# Altium PCB SpaceVNX.PcbDoc (part 2 of 2)
Units mm, origin at the board's own origin, x right, y up, seen from the top; angles counter-clockwise.
Board outline 73 x 84 mm, 6 copper layers (Top Layer, Int1 (GND), Int2 (Sign), Int3 (Sign), Int4 (PWR), Bottom Layer), stack 1.552 mm thick; 68 components, 82 nets, 1011 pads, 708 vias.
Unrouted connection lines stored in the file: 280.
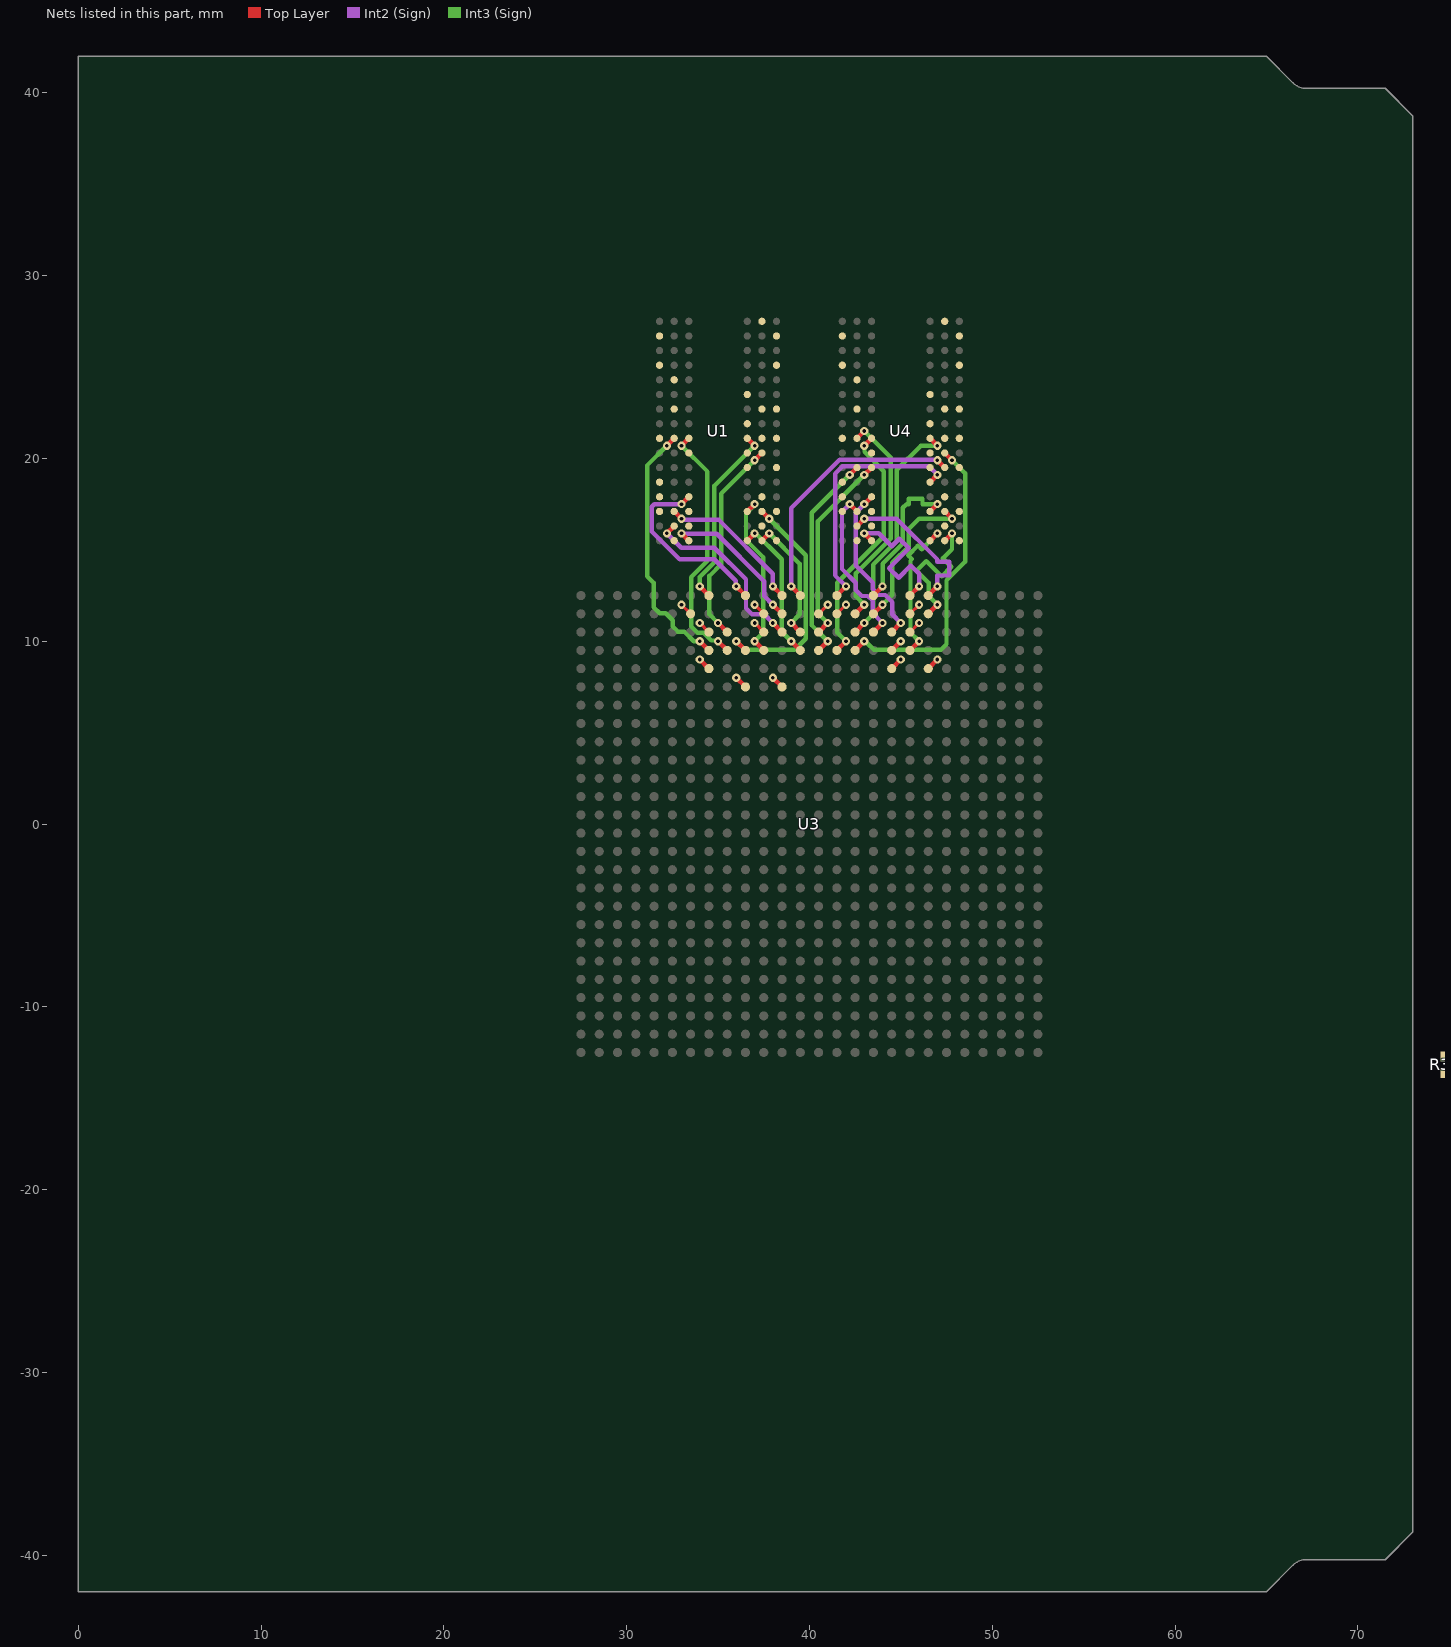
[diagram p6: the nets of this part, all layers, seen from the top]

## Via types
v1: diameter 0.45, hole 0.2, Top Layer to Bottom Layer, 708 vias

## Nets (pads, with @x,y where several pads share a name; then routed paths per layer and width w, separated by ;. In a path a pad name is that pad's centre, name@x,y a point inside that pad or via, vN(x,y) a via of type N, cw(c..) or ccw(c..) an arc to the next point about the centre after c; other vN are vias at no path point) (continued)
PS_DDR_DQ4: U1.H3 U3.H26 | length 10.2
  Top Layer w0.251: v1(34,13) U3.H26@34.5,12.5 ; U1.H3@36.6,21.1 v1(37,20.7)
  Int3 (Sign) w0.242: v1(34,13) 34,13.513 34.798,14.311 34.798,18.498 v1(37,20.7)
PS_DDR_DQ5: U1.H8 U3.H23 | length 14.2
  Top Layer w0.251: v1(32.2,20.7) U1.H8@32.6,21.1 ; v1(34,10) U3.H23@34.5,9.5
  Int3 (Sign) w0.242: v1(32.2,20.7) 31.115,19.615 31.115,13.554 31.473,13.196 31.473,11.858 31.804,11.527 32.142,11.527 32.527,11.142 32.527,10.804 32.804,10.527 33.142,10.527 33.669,10 v1(34,10)
PS_DDR_DQ6: U1.G2 U3.J24 | length 11.4
  Top Layer w0.251: v1(35,11) U3.J24@35.5,10.5 ; v1(37,19.9) U1.G2@37.4,20.3
  Int3 (Sign) w0.242: v1(35,11) 34.527,11.473 34.527,13.572 35.179,14.224 35.179,18.079 v1(37,19.9)
PS_DDR_DQ7: U1.H7 U3.J23 | length 13.9
  Top Layer w0.251: v1(33,20.7) U1.H7@33.4,21.1 ; v1(35,10) U3.J23@35.5,9.5
  Int3 (Sign) w0.242: v1(33,20.7) 34.417,19.283 34.417,14.398 33.527,13.508 33.527,10.804 33.858,10.473 34.196,10.473 34.629,10.04 34.96,10.04 v1(35,10)
PS_DDR_DQ8: U1.D7 U3.K26 | length 10.4
  Top Layer w0.251: v1(33,17.5) U1.D7@33.4,17.9 ; v1(36,13) U3.K26@36.5,12.5
  Int2 (Sign) w0.242: v1(33,17.5) 31.511,17.5 31.369,17.358 31.369,16.002 32.893,14.478 34.798,14.478 35.964,13.312 35.964,13.036 v1(36,13)
PS_DDR_DQ9: U1.C3 U3.L23 | length 9.6
  Top Layer w0.251: U1.C3@36.6,17.1 v1(37,17.5) ; v1(37,10) U3.L23@37.5,9.5
  Int3 (Sign) w0.242: v1(37,10) 37.473,10.473 37.473,13.196 37.465,13.204 37.465,14.605 36.527,15.543 36.527,16.969 36.896,17.338 36.896,17.34 v1@37.082,17.526
PS_DDR_DQ10: U1.C8 U3.M26 | length 8.2
  Top Layer w0.251: U1.C8@32.6,17.1 v1(33,16.7) ; v1(38,13) U3.M26@38.5,12.5
  Int2 (Sign) w0.242: v1@33.02,16.637 35.052,16.637 38,13.689 v1(38,13)
PS_DDR_DQ11: U1.C2 U3.K23 | length 12.9
  Top Layer w0.251: v1(36,10) U3.K23@36.5,9.5 ; U1.C2@37.4,17.1 v1(37.8,16.7)
  Int3 (Sign) w0.242: v1(36,10) 36.473,9.527 39.196,9.527 39.804,10.135 39.804,14.696 v1(37.8,16.7)
PS_DDR_DQ12: U1.A7 U3.M25 | length 8.3
  Top Layer w0.251: v1(33,15.9) U1.A7@33.4,15.5 ; v1(38,12) U3.M25@38.5,11.5
  Int2 (Sign) w0.242: v1@33.02,15.875 34.925,15.875 37.527,13.273 37.527,12.473 v1(38,12)
PS_DDR_DQ13: U1.A2 U3.N24 | length 7.1
  Top Layer w0.251: U1.A2@37.4,15.5 v1(37.8,15.9) ; v1(39,11) U3.N24@39.5,10.5
  Int3 (Sign) w0.242: v1(37.8,15.9) 39.473,14.227 39.473,11.473 v1(39,11)
PS_DDR_DQ14: U1.B8 U3.M24 | length 10
  Top Layer w0.251: v1(32.2,15.9) U1.B8@32.6,16.3 ; v1(38,11) U3.M24@38.5,10.5
  Int2 (Sign) w0.242: v1(32.2,15.9) 32.987,15.113 34.798,15.113 36.527,13.384 36.527,11.804 36.858,11.473 37.527,11.473 v1(38,11)
PS_DDR_DQ15: U1.A3 U3.N23 | length 8.1
  Top Layer w0.251: U1.A3@36.6,15.5 v1(37,15.9) ; v1(39,10) U3.N23@39.5,9.5
  Int3 (Sign) w0.242: v1@36.957,16.002 38.481,14.478 38.481,10.519 v1(39,10)
PS_DDR_DQ16: U3.R26 U4.E3 | length 13.6
  Top Layer w0.251: U3.R26@41.5,12.5 v1(42,13) ; U4.E3@46.6,18.7 v1(47,19.1)
  Int2 (Sign) w0.242: v1(42,13) 41.402,13.598 41.402,19.162 41.813,19.573 46.527,19.573 v1(47,19.1)
PS_DDR_DQ17: U3.P24 U4.F7 | length 10.6
  Top Layer w0.251: U3.P24@40.5,10.5 v1(41,11) ; v1(43,19.1) U4.F7@43.4,19.5
  Int3 (Sign) w0.242: v1(41,11) 40.466,11.534 40.466,14.97 40.463,14.973 40.463,16.563 v1(43,19.1)
PS_DDR_DQ18: U3.N26 U4.F2 | length 14.7
  Top Layer w0.251: v1(39,13) U3.N26@39.5,12.5 ; v1(47,19.9) U4.F2@47.4,19.5
  Int2 (Sign) w0.242: v1(39,13) 39,17.283 41.656,19.939 46.961,19.939 v1(47,19.9)
PS_DDR_DQ19: U3.P23 U4.F8 | length 11.6
  Top Layer w0.251: U3.P23@40.5,9.5 v1(41,10) ; v1(42.2,19.1) U4.F8@42.6,19.5
  Int3 (Sign) w0.242: v1(41,10) 40.135,10.865 40.135,14.833 40.132,14.836 40.132,17.032 v1(42.2,19.1)
PS_DDR_DQ20: U3.T24 U4.H3 | length 13.2
  Top Layer w0.251: U3.T24@42.5,10.5 v1(43,11) ; U4.H3@46.6,21.1 v1(47,20.7)
  Int3 (Sign) w0.242: v1(43,11) 43.491,11.491 43.491,14.194 44.781,15.484 44.781,19.381 46.1,20.7 v1(47,20.7)
PS_DDR_DQ21: U3.T25 U4.H8 | length 12.4
  Top Layer w0.251: U3.T25@42.5,11.5 v1(43,12) ; U4.H8@42.6,21.1 v1(43,21.5)
  Int3 (Sign) w0.242: v1(43,12) 42.545,12.455 42.545,13.716 44.45,15.621 44.45,20.05 v1(43,21.5)
PS_DDR_DQ22: U3.T23 U4.G2 | length 16.9
  Top Layer w0.251: U3.T23@42.5,9.5 v1(43,10) ; U4.G2@47.4,20.3 v1(47.8,19.9)
  Int3 (Sign) w0.242: v1(43,10) 43.056,10 43.16,9.896 43.164,9.896 43.533,9.527 47.196,9.527 47.498,9.829 47.498,13.335 48.514,14.351 48.514,19.186 v1(47.8,19.9)
PS_DDR_DQ23: U3.R23 U4.H7 | length 13.6
  Top Layer w0.251: U3.R23@41.5,9.5 v1(42,10) ; v1(43,20.7) U4.H7@43.4,21.1
  Int3 (Sign) w0.242: v1(42,10) 41.527,10.473 41.527,13.206 44.069,15.748 44.069,19.304 43.01,20.363 v1@43.01,20.69
PS_DDR_DQ24: U3.V24 U4.D7 | length 9.2
  Top Layer w0.251: v1(43,17.5) U4.D7@43.4,17.9 ; U3.V24@44.5,10.5 v1(45,11)
  Int2 (Sign) w0.242: v1(43,17.5) 42.527,17.027 42.527,14.142 43.473,13.196 43.473,12.858 43.804,12.527 44.142,12.527 44.527,12.142 44.527,11.473 v1(45,11)
PS_DDR_DQ25: U3.U26 U4.C3 | length 8.6
  Top Layer w0.251: U3.U26@43.5,12.5 v1(44,13) ; U4.C3@46.6,17.1 v1(47,17.5)
  Int3 (Sign) w0.242: v1(44,13) 44,14.235 45.112,15.347 45.112,17.299 45.313,17.5 45.434,17.5 45.434,17.791 46.184,17.791 46.184,17.5 46.7,17.5 v1(47,17.5)
PS_DDR_DQ26: U3.U24 U4.C8 | length 9.1
  Top Layer w0.251: v1(42.2,17.5) U4.C8@42.6,17.1 ; U3.U24@43.5,10.5 v1(44,11)
  Int2 (Sign) w0.242: v1(42.2,17.5) 41.783,17.083 41.783,13.95 42.527,13.206 42.527,12.804 42.858,12.473 43.196,12.473 43.473,12.196 43.473,11.527 v1(44,11)
PS_DDR_DQ27: U3.U25 U4.C2 | length 8.6
  Top Layer w0.251: U3.U25@43.5,11.5 v1(44,12) ; U4.C2@47.4,17.1 v1(47.8,16.7)
  Int3 (Sign) w0.242: v1(44,12) 44.527,12.527 44.527,14.294 45.443,15.21 45.443,16.146 45.997,16.7 v1(47.8,16.7)
PS_DDR_DQ28: U3.W26 U4.A7 | length 9
  Top Layer w0.251: v1(43,15.9) U4.A7@43.4,15.5 ; U3.W26@45.5,12.5 v1(46,13)
  Int2 (Sign) w0.242: v1(43,15.9) 43.79,15.9 44.414,15.276 44.5,15.19 44.919,15.61 45.444,15.085 44.357,13.998 44.881,13.473 45.549,14.141 45.656,14.034 46,13.69 v1(46,13)
PS_DDR_DQ29: U3.Y25 U4.A2 | length 8.5
  Top Layer w0.251: U3.Y25@46.5,11.5 v1(47,12) ; U4.A2@47.4,15.5 v1(47.8,15.9)
  Int3 (Sign) w0.242: v1(47,12) 46.527,12.473 46.527,13.016 46.527,13.187 45.858,13.857 46.388,14.387 47.235,13.54 47.765,14.07 47.301,14.535 47.8,15.034 47.8,15.369 v1(47.8,15.9)
PS_DDR_DQ30: U3.Y26 U4.B8 | length 9
  Top Layer w0.251: U4.B8@42.6,16.3 v1(43,16.7) ; U3.Y26@46.5,12.5 v1(47,13)
  Int2 (Sign) w0.242: v1(43,16.7) 44.768,16.7 47,14.468 47,14.347 47.648,14.347 47.648,13.597 47,13.597 v1(47,13)
PS_DDR_DQ31: U3.W23 U4.A3 | length 8.6
  Top Layer w0.251: U3.W23@45.5,9.5 v1(46,10) ; U4.A3@46.6,15.5 v1(47,15.9)
  Int3 (Sign) w0.242: v1(46,10) 45.527,10.473 45.527,14.412 45.613,14.498 45.406,14.705 45.936,15.235 46.143,15.028 46.736,15.621 47,15.885 v1(47,15.9)
PS_DDR_DQS_BYTE0_N: U1.G3 U3.G25 | length 0.7
  Top Layer w0.175: v1(33,12) U3.G25@33.5,11.5
PS_DDR_DQS_BYTE0_P: U1.F3 U3.H24 | length 0.7
  Top Layer w0.175: v1(34,11) U3.H24@34.5,10.5
PS_DDR_DQS_BYTE1_N: U1.B7 U3.L25 | length 0.7
  Top Layer w0.175: v1(37,12) U3.L25@37.5,11.5
PS_DDR_DQS_BYTE1_P: U1.C7 U3.L24 | length 0.7
  Top Layer w0.175: v1(37,11) U3.L24@37.5,10.5
PS_DDR_DQS_BYTE2_N: U3.R25 U4.G3 | length 0.7
  Top Layer w0.175: U3.R25@41.5,11.5 v1(42,12)
PS_DDR_DQS_BYTE2_P: U3.P25 U4.F3 | length 0.7
  Top Layer w0.175: U3.P25@40.5,11.5 v1(41,12)
PS_DDR_DQS_BYTE3_N: U3.W25 U4.B7 | length 0.7
  Top Layer w0.175: U3.W25@45.5,11.5 v1(46,12)
PS_DDR_DQS_BYTE3_P: U3.W24 U4.C7 | length 0.7
  Top Layer w0.175: U3.W24@45.5,10.5 v1(46,11)
PS_DDR_ODT: R32.1 U1.K1 U3.Y22 U4.K1 | length 0.7
  Top Layer w0.251: U3.Y22@46.5,8.5 v1(47,9)
PS_DDR_RAS: R30.1 U1.J3 U3.V23 U4.J3 | length 0.7
  Top Layer w0.251: U3.V23@44.5,9.5 v1(45,10)
PS_DDR_RST: R4.1 U1.T2 U3.H22 U4.T2 | length 0.7
  Top Layer w0.251: v1(34,9) U3.H22@34.5,8.5
PS_DDR_WE: R31.1 U1.L3 U3.V22 U4.L3 | length 0.7
  Top Layer w0.251: U3.V22@44.5,8.5 v1(45,9)
VCCO_DDR: C3.2 C4.2 C11.2 C12.2 C13.2 C14.2 C15.2 C16.2 C17.2 C18.2 C19.2 C20.2 C21.2 C22.2 C23.2 C24.2 C25.2 C26.2 C27.2 C28.2 C29.2 C30.2 R1.2 R6.1 U1.A1 U1.A8 U1.B2 U1.C1 U1.C9 U1.D2 U1.D9 U1.E9 U1.F1 U1.G7 U1.H2 U1.H9 U1.K2 U1.K8 U1.N1 U1.N9 U1.R1 U1.R9 U2.1 U4.A1 U4.A8 U4.B2 U4.C1 U4.C9 U4.D2 U4.D9 U4.E9 U4.F1 U4.G7 U4.H2 U4.H9 U4.K2 U4.K8 U4.N1 U4.N9 U4.R1 U4.R9
VTT_DDR: C5.2 C6.2 C7.2 R8.2 R9.2 R10.2 R11.2 R12.2 R13.2 R14.2 R15.2 R16.2 R17.2 R19.2 R20.2 R21.2 R22.2 R23.2 R24.2 R25.2 R26.2 R27.2 R28.2 R29.2 R30.2 R31.2 R32.2 U2.3 U2.5
VTT_REF: C8.2 C9.2 C10.2 C31.2 C32.2 U1.H1 U1.M8 U2.6 U3.K21 U3.M21 U4.H1 U4.M8 | length 1.4
  Top Layer w0.254: v1(36,8) U3.K21@36.5,7.5 ; v1(38,8) U3.M21@38.5,7.5
pads on no net: U1.J1 U1.J9 U1.L1 U1.L9 U1.M7 U2.9 U2.11 U2.12 U2.13 U2.14 U2.15 U3.A1 U3.A2 U3.A3 U3.A4 U3.A5 U3.A6 U3.A7 U3.A8 U3.A9 U3.A10 U3.A11 U3.A12 U3.A13 U3.A14 U3.A15 U3.A16 U3.A17 U3.A18 U3.A19 U3.A20 U3.A21 U3.A22 U3.A23 U3.A24 U3.A25 U3.A26 U3.AA1 U3.AA2 U3.AA3 U3.AA4 U3.AA5 U3.AA6 U3.AA7 U3.AA8 U3.AA9 U3.AA10 U3.AA11 U3.AA12 U3.AA13 U3.AA14 U3.AA15 U3.AA16 U3.AA17 U3.AA18 U3.AA19 U3.AA20 U3.AA21 U3.AA22 U3.AA23 U3.AA24 U3.AA25 U3.AA26 U3.AB1 U3.AB2 U3.AB3 U3.AB4 U3.AB5 U3.AB6 U3.AB7 U3.AB8 U3.AB9 U3.AB10 U3.AB11 U3.AB12 U3.AB13 U3.AB14 U3.AB15 U3.AB16 U3.AB17 U3.AB18 U3.AB19 U3.AB20 U3.AB21 U3.AB22 U3.AB23 U3.AB24 U3.AB25 U3.AB26 U3.AC1 U3.AC2 U3.AC3 U3.AC4 U3.AC5 U3.AC6 U3.AC7 U3.AC8 U3.AC9 U3.AC10 U3.AC11 U3.AC12 U3.AC13 U3.AC14 U3.AC15 U3.AC16 U3.AC17 U3.AC18 U3.AC19 U3.AC20 U3.AC21 U3.AC22 U3.AC23 U3.AC24 U3.AC25 U3.AC26 U3.AD1 U3.AD2 U3.AD3 U3.AD4 U3.AD5 U3.AD6 U3.AD7 U3.AD8 U3.AD9 U3.AD10 U3.AD11 U3.AD12 U3.AD13 U3.AD14 U3.AD15 U3.AD16 U3.AD17 U3.AD18 U3.AD19 U3.AD20 U3.AD21 U3.AD22 U3.AD23 U3.AD24 U3.AD25 U3.AD26 U3.AE1 U3.AE2 U3.AE3 U3.AE4 U3.AE5 U3.AE6 U3.AE7 U3.AE8 U3.AE9 U3.AE10 U3.AE11 U3.AE12 U3.AE13 U3.AE14 U3.AE15 U3.AE16 U3.AE17 U3.AE18 U3.AE19 U3.AE20 U3.AE21 U3.AE22 U3.AE23 U3.AE24 U3.AE25 U3.AE26 U3.AF1 U3.AF2 U3.AF3 U3.AF4 U3.AF5 U3.AF6 U3.AF7 U3.AF8 U3.AF9 U3.AF10 U3.AF11 U3.AF12 U3.AF13 U3.AF14 U3.AF15 U3.AF16 U3.AF17 U3.AF18 U3.AF19 U3.AF20 U3.AF21 U3.AF22 U3.AF23 U3.AF24 U3.AF25 U3.AF26 U3.B1 U3.B2 U3.B3 U3.B4 U3.B5 U3.B6 U3.B7 U3.B8 U3.B9 U3.B10 U3.B11 U3.B12 U3.B13 U3.B14 U3.B15 U3.B16 U3.B17 U3.B18 U3.B19 U3.B20 U3.B21 U3.B22 U3.B23 U3.B24 U3.B25 U3.B26 U3.C1 U3.C2 U3.C3 U3.C4 U3.C5 U3.C6 U3.C7 U3.C8 U3.C9 U3.C10 U3.C11 U3.C12 U3.C13 U3.C14 U3.C15 U3.C16 U3.C17 U3.C18 U3.C19 U3.C20 U3.C21 U3.C22 U3.C23 U3.C24 U3.C25 U3.C26 U3.D1 U3.D2 U3.D3 U3.D4 U3.D5 U3.D6 U3.D7 U3.D8 U3.D9 U3.D10 U3.D11 U3.D12 U3.D13 U3.D14 U3.D15 U3.D16 U3.D17 U3.D18 U3.D19 U3.D20 U3.D21 U3.D22 U3.D23 U3.D24 U3.D25 U3.D26 U3.E1 U3.E2 U3.E3 U3.E4 U3.E5 U3.E6 U3.E7 U3.E8 U3.E9 U3.E10 U3.E11 U3.E12 U3.E13 U3.E14 U3.E15 U3.E16 U3.E17 U3.E18 U3.E19 U3.E20 U3.E21 U3.E22 U3.E23 U3.E24 U3.E25 U3.E26 U3.F1 U3.F2 U3.F3 U3.F4 U3.F5 U3.F6 U3.F7 U3.F8 U3.F9 U3.F10 U3.F11 U3.F12 U3.F13 U3.F14 U3.F15 U3.F16 U3.F17 U3.F18 U3.F19 U3.F20 U3.F21 U3.F22 U3.F23 U3.F24 U3.F26 U3.G1 U3.G2 U3.G3 U3.G4 U3.G5 U3.G6 U3.G7 U3.G8 U3.G9 U3.G10 U3.G11 U3.G12 U3.G13 U3.G14 U3.G15 U3.G16 U3.G17 U3.G18 U3.G19 U3.G20 U3.G21 U3.G22 U3.G23 U3.H1 U3.H2 U3.H3 U3.H4 U3.H5 U3.H6 U3.H7 U3.H8 U3.H9 U3.H10 U3.H11 U3.H12 U3.H13 U3.H14 U3.H15 U3.H16 U3.H17 U3.H18 U3.H19 U3.H20 U3.H25 U3.J1 U3.J2 U3.J3 U3.J4 U3.J5 U3.J6 U3.J7 U3.J8 U3.J9 U3.J10 U3.J11 U3.J12 U3.J13 U3.J14 U3.J15 U3.J16 U3.J17 U3.J18 U3.J19 U3.J22 U3.K1 U3.K2 U3.K3 U3.K4 U3.K5 U3.K6 U3.K7 U3.K8 U3.K9 U3.K10 U3.K11 U3.K12 U3.K13 U3.K14 U3.K15 U3.K16 U3.K17 U3.K18 U3.K19 U3.K24 U3.L1 U3.L2 U3.L3 U3.L4 U3.L5 U3.L6 U3.L7 U3.L8 U3.L9 U3.L10 U3.L11 U3.L12 U3.L13 U3.L14 U3.L15 U3.L16 U3.L17 U3.L18 U3.L19 U3.L21 U3.L26 U3.M1 U3.M2 U3.M3 U3.M4 U3.M5 U3.M6 U3.M7 U3.M8 U3.M9 U3.M10 U3.M11 U3.M12 U3.M13 U3.M14 U3.M15 U3.M16 U3.M17 U3.M18 U3.M19 U3.M23 U3.N1 U3.N2 U3.N3 U3.N4 U3.N5 U3.N6 U3.N7 U3.N8 U3.N9 U3.N10 U3.N11 U3.N12 U3.N13 U3.N14 U3.N15 U3.N16 U3.N17 U3.N18 U3.N19 U3.N20 U3.N25 U3.P1 U3.P2 U3.P3 U3.P4 U3.P5 U3.P6 U3.P7 U3.P8 U3.P9 U3.P10 U3.P11 U3.P12 U3.P13 U3.P14 U3.P15 U3.P16 U3.P17 U3.P18 U3.P19 U3.P22 U3.R1 U3.R2 U3.R3 U3.R4 U3.R5 U3.R6 U3.R7 U3.R8 U3.R9 U3.R10 U3.R11 U3.R12 U3.R13 U3.R14 U3.R15 U3.R16 U3.R17 U3.R18 U3.R19 U3.R24 U3.T1 U3.T2 U3.T3 U3.T4 U3.T5 U3.T6 U3.T7 U3.T8 U3.T9 U3.T10 U3.T11 U3.T12 U3.T13 U3.T14 U3.T15 U3.T16 U3.T17 U3.T18 U3.T19 U3.T21 U3.T26 U3.U1 U3.U2 U3.U3 U3.U4 U3.U5 U3.U6 U3.U7 U3.U8 U3.U9 U3.U10 U3.U11 U3.U12 U3.U13 U3.U14 U3.U15 U3.U16 U3.U17 U3.U18 U3.U19 U3.U23 U3.V1 U3.V2 U3.V3 U3.V4 U3.V5 U3.V6 U3.V7 U3.V8 U3.V9 U3.V10 U3.V11 U3.V12 U3.V13 U3.V14 U3.V15 U3.V16 U3.V17 U3.V18 U3.V19 U3.V20 U3.V25 U3.W1 U3.W2 U3.W3 U3.W4 U3.W5 U3.W6 U3.W7 U3.W8 U3.W9 U3.W10 U3.W11 U3.W12 U3.W13 U3.W14 U3.W15 U3.W16 U3.W17 U3.W18 U3.W19 U3.W20 U3.W22 U3.Y1 U3.Y2 U3.Y3 U3.Y4 U3.Y5 U3.Y6 U3.Y7 U3.Y8 U3.Y9 U3.Y10 U3.Y11 U3.Y12 U3.Y13 U3.Y14 U3.Y15 U3.Y16 U3.Y17 U3.Y18 U3.Y19 U3.Y20 U3.Y24 U4.J1 U4.J9 U4.L1 U4.L9 U4.M7
copper on no net: | length 425
  Top Layer w0.254: v1(27,-13) 27.5,-12.5 ; v1(27,-12) 27.5,-11.5 ; v1(27,-11) 27.5,-10.5 ; v1(27,-10) 27.5,-9.5 ; v1(27,-9) 27.5,-8.5 ; v1(27,-8) 27.5,-7.5 ; v1(27,-7) 27.5,-6.5 ; v1(27,-6) 27.5,-5.5 ; v1(27,-5) 27.5,-4.5 ; v1(27,-4) 27.5,-3.5 ; v1(27,-3) 27.5,-2.5 ; v1(27,-2) 27.5,-1.5 ; v1(27,-1) 27.5,-0.5 ; v1(27,1) 27.5,0.5 ; v1(27,2) 27.5,1.5 ; v1(27,3) 27.5,2.5 ; v1(27,4) 27.5,3.5 ; v1(27,5) 27.5,4.5 ; v1(27,6) 27.5,5.5 ; v1(27,7) 27.5,6.5 ; v1(27,8) 27.5,7.5 ; v1(27,9) 27.5,8.5 ; v1(27,10) 27.5,9.5 ; v1(27,11) 27.5,10.5 ; v1(27,12) 27.5,11.5 ; v1(27,13) 27.5,12.5 ; v1(28,-13) 28.5,-12.5 ; v1(28,-12) 28.5,-11.5 ; v1(28,-11) 28.5,-10.5 ; v1(28,-10) 28.5,-9.5 ; v1(28,-9) 28.5,-8.5 ; v1(28,-8) 28.5,-7.5 ; v1(28,-7) 28.5,-6.5 ; v1(28,-6) 28.5,-5.5 ; v1(28,-5) 28.5,-4.5 ; v1(28,-4) 28.5,-3.5 ; v1(28,-3) 28.5,-2.5 ; v1(28,-2) 28.5,-1.5 ; v1(28,-1) 28.5,-0.5 ; v1(28,1) 28.5,0.5 ; v1(28,2) 28.5,1.5 ; v1(28,3) 28.5,2.5 ; v1(28,4) 28.5,3.5 ; v1(28,5) 28.5,4.5 ; v1(28,6) 28.5,5.5 ; v1(28,7) 28.5,6.5 ; v1(28,8) 28.5,7.5 ; v1(28,9) 28.5,8.5 ; v1(28,10) 28.5,9.5 ; v1(28,11) 28.5,10.5 ; v1(28,12) 28.5,11.5 ; v1(28,13) 28.5,12.5 ; v1(29,-13) 29.5,-12.5 ; v1(29,-12) 29.5,-11.5 ; v1(29,-11) 29.5,-10.5 ; v1(29,-10) 29.5,-9.5 ; v1(29,-9) 29.5,-8.5 ; v1(29,-8) 29.5,-7.5 ; v1(29,-7) 29.5,-6.5 ; v1(29,-6) 29.5,-5.5 ; v1(29,-5) 29.5,-4.5 ; v1(29,-4) 29.5,-3.5 ; v1(29,-3) 29.5,-2.5 ; v1(29,-2) 29.5,-1.5 ; v1(29,-1) 29.5,-0.5 ; v1(29,1) 29.5,0.5 ; v1(29,2) 29.5,1.5 ; v1(29,3) 29.5,2.5 ; v1(29,4) 29.5,3.5 ; v1(29,5) 29.5,4.5 ; v1(29,6) 29.5,5.5 ; v1(29,7) 29.5,6.5 ; v1(29,8) 29.5,7.5 ; v1(29,9) 29.5,8.5 ; v1(29,10) 29.5,9.5 ; v1(29,11) 29.5,10.5 ; v1(29,12) 29.5,11.5 ; v1(29,13) 29.5,12.5 ; v1(30,-13) 30.5,-12.5 ; v1(30,-12) 30.5,-11.5 ; v1(30,-11) 30.5,-10.5 ; v1(30,-10) 30.5,-9.5 ; v1(30,-9) 30.5,-8.5 ; v1(30,-8) 30.5,-7.5 ; v1(30,-7) 30.5,-6.5 ; v1(30,-6) 30.5,-5.5 ; v1(30,-5) 30.5,-4.5 ; v1(30,-4) 30.5,-3.5 ; v1(30,-3) 30.5,-2.5 ; v1(30,-2) 30.5,-1.5 ; v1(30,-1) 30.5,-0.5 ; v1(30,1) 30.5,0.5 ; v1(30,2) 30.5,1.5 ; v1(30,3) 30.5,2.5 ; v1(30,4) 30.5,3.5 ; v1(30,5) 30.5,4.5 ; v1(30,6) 30.5,5.5 ; v1(30,7) 30.5,6.5 ; v1(30,8) 30.5,7.5 ; v1(30,9) 30.5,8.5 ; v1(30,10) 30.5,9.5 ; v1(30,11) 30.5,10.5 ; v1(30,12) 30.5,11.5 ; v1(30,13) 30.5,12.5 ; v1(31,-13) 31.5,-12.5 ; v1(31,-12) 31.5,-11.5 ; v1(31,-11) 31.5,-10.5 ; v1(31,-10) 31.5,-9.5 ; v1(31,-9) 31.5,-8.5 ; v1(31,-8) 31.5,-7.5 ; v1(31,-7) 31.5,-6.5 ; v1(31,-6) 31.5,-5.5 ; v1(31,-5) 31.5,-4.5 ; v1(31,-4) 31.5,-3.5 ; v1(31,-3) 31.5,-2.5 ; v1(31,-2) 31.5,-1.5 ; v1(31,-1) 31.5,-0.5 ; v1(31,1) 31.5,0.5 ; v1(31,2) 31.5,1.5 ; v1(31,3) 31.5,2.5 ; v1(31,4) 31.5,3.5 ; v1(31,5) 31.5,4.5 ; v1(31,6) 31.5,5.5 ; v1(31,7) 31.5,6.5 ; v1(31,8) 31.5,7.5 ; v1(31,9) 31.5,8.5 ; v1(31,10) 31.5,9.5 ; v1(31,11) 31.5,10.5 ; v1(31,12) 31.5,11.5 ; v1(31,13) 31.5,12.5 ; v1(32,-13) 32.5,-12.5 ; v1(32,-12) 32.5,-11.5 ; v1(32,-11) 32.5,-10.5 ; v1(32,-10) 32.5,-9.5 ; v1(32,-9) 32.5,-8.5 ; v1(32,-8) 32.5,-7.5 ; v1(32,-7) 32.5,-6.5 ; v1(32,-6) 32.5,-5.5 ; v1(32,-5) 32.5,-4.5 ; v1(32,-4) 32.5,-3.5 ; v1(32,-3) 32.5,-2.5 ; v1(32,-2) 32.5,-1.5 ; v1(32,-1) 32.5,-0.5 ; v1(32,1) 32.5,0.5 ; v1(32,2) 32.5,1.5 ; v1(32,3) 32.5,2.5 ; v1(32,4) 32.5,3.5 ; v1(32,5) 32.5,4.5 ; v1(32,6) 32.5,5.5 ; v1(32,7) 32.5,6.5 ; v1(32,8) 32.5,7.5 ; v1(32,9) 32.5,8.5 ; v1(32,10) 32.5,9.5 ; v1(32,11) 32.5,10.5 ; v1(32,13) 32.5,12.5 ; v1(33,-13) 33.5,-12.5 ; v1(33,-12) 33.5,-11.5 ; v1(33,-11) 33.5,-10.5 ; v1(33,-10) 33.5,-9.5 ; v1(33,-9) 33.5,-8.5 ; v1(33,-8) 33.5,-7.5 ; v1(33,-7) 33.5,-6.5 ; v1(33,-6) 33.5,-5.5 ; v1(33,-5) 33.5,-4.5 ; v1(33,-4) 33.5,-3.5 ; v1(33,-3) 33.5,-2.5 ; v1(33,-2) 33.5,-1.5 ; v1(33,-1) 33.5,-0.5 ; v1(33,1) 33.5,0.5 ; v1(33,2) 33.5,1.5 ; v1(33,3) 33.5,2.5 ; v1(33,4) 33.5,3.5 ; v1(33,5) 33.5,4.5 ; v1(33,6) 33.5,5.5 ; v1(33,7) 33.5,6.5 ; v1(33,8) 33.5,7.5 ; v1(33,9) 33.5,8.5 ; v1(33,10) 33.5,9.5 ; v1(34,-13) 34.5,-12.5 ; v1(34,-12) 34.5,-11.5 ; v1(34,-11) 34.5,-10.5 ; v1(34,-10) 34.5,-9.5 ; v1(34,-9) 34.5,-8.5 ; v1(34,-8) 34.5,-7.5 ; v1(34,-7) 34.5,-6.5 ; v1(34,-6) 34.5,-5.5 ; v1(34,-5) 34.5,-4.5 ; v1(34,-4) 34.5,-3.5 ; v1(34,-3) 34.5,-2.5 ; v1(34,-2) 34.5,-1.5 ; v1(34,-1) 34.5,-0.5 ; v1(34,1) 34.5,0.5 ; v1(34,2) 34.5,1.5 ; v1(34,3) 34.5,2.5 ; v1(34,4) 34.5,3.5 ; v1(34,5) 34.5,4.5 ; v1(34,6) 34.5,5.5 ; v1(34,7) 34.5,6.5 ; v1(34,12) 34.5,11.5 ; v1(35,-13) 35.5,-12.5 ; v1(35,-12) 35.5,-11.5 ; v1(35,-11) 35.5,-10.5 ; v1(35,-10) 35.5,-9.5 ; v1(35,-9) 35.5,-8.5 ; v1(35,-8) 35.5,-7.5 ; v1(35,-7) 35.5,-6.5 ; v1(35,-6) 35.5,-5.5 ; v1(35,-5) 35.5,-4.5 ; v1(35,-4) 35.5,-3.5 ; v1(35,-3) 35.5,-2.5 ; v1(35,-2) 35.5,-1.5 ; v1(35,-1) 35.5,-0.5 ; v1(35,1) 35.5,0.5 ; v1(35,2) 35.5,1.5 ; v1(35,3) 35.5,2.5 ; v1(35,4) 35.5,3.5 ; v1(35,5) 35.5,4.5 ; v1(35,6) 35.5,5.5 ; v1(35,9) 35.5,8.5 ; v1(36,-13) 36.5,-12.5 ; v1(36,-12) 36.5,-11.5 ; v1(36,-11) 36.5,-10.5 ; v1(36,-10) 36.5,-9.5 ; v1(36,-9) 36.5,-8.5 ; v1(36,-8) 36.5,-7.5 ; v1(36,-7) 36.5,-6.5 ; v1(36,-6) 36.5,-5.5 ; v1(36,-5) 36.5,-4.5 ; v1(36,-4) 36.5,-3.5 ; v1(36,-3) 36.5,-2.5 ; v1(36,-2) 36.5,-1.5 ; v1(36,-1) 36.5,-0.5 ; v1(36,1) 36.5,0.5 ; v1(36,2) 36.5,1.5 ; v1(36,3) 36.5,2.5 ; v1(36,4) 36.5,3.5 ; v1(36,5) 36.5,4.5 ; v1(36,6) 36.5,5.5 ; v1(36,11) 36.5,10.5 ; v1(37,-13) 37.5,-12.5 ; v1(37,-12) 37.5,-11.5 ; v1(37,-11) 37.5,-10.5 ; v1(37,-10) 37.5,-9.5 ; v1(37,-9) 37.5,-8.5 ; v1(37,-8) 37.5,-7.5 ; v1(37,-7) 37.5,-6.5 ; v1(37,-6) 37.5,-5.5 ; v1(37,-5) 37.5,-4.5 ; v1(37,-4) 37.5,-3.5 ; v1(37,-3) 37.5,-2.5 ; v1(37,-2) 37.5,-1.5 ; v1(37,-1) 37.5,-0.5 ; v1(37,1) 37.5,0.5 ; v1(37,2) 37.5,1.5 ; v1(37,3) 37.5,2.5 ; v1(37,4) 37.5,3.5 ; v1(37,5) 37.5,4.5 ; v1(37,6) 37.5,5.5 ; v1(37,8) 37.5,7.5 ; v1(37,13) 37.5,12.5 ; v1(38,-13) 38.5,-12.5 ; v1(38,-12) 38.5,-11.5 ; v1(38,-11) 38.5,-10.5 ; v1(38,-10) 38.5,-9.5 ; v1(38,-9) 38.5,-8.5 ; v1(38,-8) 38.5,-7.5 ; v1(38,-7) 38.5,-6.5 ; v1(38,-6) 38.5,-5.5 ; v1(38,-5) 38.5,-4.5 ; v1(38,-4) 38.5,-3.5 ; v1(38,-3) 38.5,-2.5 ; v1(38,-2) 38.5,-1.5 ; v1(38,-1) 38.5,-0.5 ; v1(38,1) 38.5,0.5 ; v1(38,2) 38.5,1.5 ; v1(38,3) 38.5,2.5 ; v1(38,4) 38.5,3.5 ; v1(38,5) 38.5,4.5 ; v1(38,6) 38.5,5.5 ; v1(38,10) 38.5,9.5 ; v1(39,-13) 39.5,-12.5 ; v1(39,-12) 39.5,-11.5 ; v1(39,-11) 39.5,-10.5 ; v1(39,-10) 39.5,-9.5 ; v1(39,-9) 39.5,-8.5 ; v1(39,-8) 39.5,-7.5 ; v1(39,-7) 39.5,-6.5 ; v1(39,-6) 39.5,-5.5 ; v1(39,-5) 39.5,-4.5 ; v1(39,-4) 39.5,-3.5 ; v1(39,-3) 39.5,-2.5 ; v1(39,-2) 39.5,-1.5 ; v1(39,-1) 39.5,-0.5 ; v1(39,1) 39.5,0.5 ; v1(39,2) 39.5,1.5 ; v1(39,3) 39.5,2.5 ; v1(39,4) 39.5,3.5 ; v1(39,5) 39.5,4.5 ; v1(39,6) 39.5,5.5 ; v1(39,7) 39.5,6.5 ; v1(39,12) 39.5,11.5 ; 40.5,-12.5 v1(41,-13) ; 40.5,-11.5 v1(41,-12) ; 40.5,-10.5 v1(41,-11) ; 40.5,-9.5 v1(41,-10) ; 40.5,-8.5 v1(41,-9) ; 40.5,-7.5 v1(41,-8) ; 40.5,-6.5 v1(41,-7) ; 40.5,-5.5 v1(41,-6) ; 40.5,-4.5 v1(41,-5) ; 40.5,-3.5 v1(41,-4) ; 40.5,-2.5 v1(41,-3) ; 40.5,-1.5 v1(41,-2) ; 40.5,-0.5 v1(41,-1) ; 40.5,0.5 v1(41,1) ; 40.5,1.5 v1(41,2) ; 40.5,2.5 v1(41,3) ; 40.5,3.5 v1(41,4) ; 40.5,4.5 v1(41,5) ; 40.5,5.5 v1(41,6) ; 40.5,8.5 v1(41,9) ; 41.5,-12.5 v1(42,-13) ; 41.5,-11.5 v1(42,-12) ; 41.5,-10.5 v1(42,-11) ; 41.5,-9.5 v1(42,-10) ; 41.5,-8.5 v1(42,-9) ; 41.5,-7.5 v1(42,-8) ; 41.5,-6.5 v1(42,-7) ; 41.5,-5.5 v1(42,-6) ; 41.5,-4.5 v1(42,-5) ; 41.5,-3.5 v1(42,-4) ; 41.5,-2.5 v1(42,-3) ; 41.5,-1.5 v1(42,-2) ; 41.5,-0.5 v1(42,-1) ; 41.5,0.5 v1(42,1) ; 41.5,1.5 v1(42,2) ; 41.5,2.5 v1(42,3) ; 41.5,3.5 v1(42,4) ; 41.5,4.5 v1(42,5) ; 41.5,5.5 v1(42,6) ; 41.5,10.5 v1(42,11) ; 42.5,-12.5 v1(43,-13) ; 42.5,-11.5 v1(43,-12) ; 42.5,-10.5 v1(43,-11) ; 42.5,-9.5 v1(43,-10) ; 42.5,-8.5 v1(43,-9) ; 42.5,-7.5 v1(43,-8) ; 42.5,-6.5 v1(43,-7) ; 42.5,-5.5 v1(43,-6) ; 42.5,-4.5 v1(43,-5) ; 42.5,-3.5 v1(43,-4) ; 42.5,-2.5 v1(43,-3) ; 42.5,-1.5 v1(43,-2) ; 42.5,-0.5 v1(43,-1) ; 42.5,0.5 v1(43,1) ; 42.5,1.5 v1(43,2) ; 42.5,2.5 v1(43,3) ; 42.5,3.5 v1(43,4) ; 42.5,4.5 v1(43,5) ; 42.5,5.5 v1(43,6) ; 42.5,7.5 v1(43,8) ; 42.5,12.5 v1(43,13) ; 43.5,-12.5 v1(44,-13) ; 43.5,-11.5 v1(44,-12) ; 43.5,-10.5 v1(44,-11) ; 43.5,-9.5 v1(44,-10) ; 43.5,-8.5 v1(44,-9) ; 43.5,-7.5 v1(44,-8) ; 43.5,-6.5 v1(44,-7) ; 43.5,-5.5 v1(44,-6) ; 43.5,-4.5 v1(44,-5) ; 43.5,-3.5 v1(44,-4) ; 43.5,-2.5 v1(44,-3) ; 43.5,-1.5 v1(44,-2) ; 43.5,-0.5 v1(44,-1) ; 43.5,0.5 v1(44,1) ; 43.5,1.5 v1(44,2) ; 43.5,2.5 v1(44,3) ; 43.5,3.5 v1(44,4) ; 43.5,4.5 v1(44,5) ; 43.5,5.5 v1(44,6) ; 43.5,9.5 v1(44,10) ; 44.5,-12.5 v1(45,-13) ; 44.5,-11.5 v1(45,-12) ; 44.5,-10.5 v1(45,-11) ; 44.5,-9.5 v1(45,-10) ; 44.5,-8.5 v1(45,-9) ; 44.5,-7.5 v1(45,-8) ; 44.5,-6.5 v1(45,-7) ; 44.5,-5.5 v1(45,-6) ; 44.5,-4.5 v1(45,-5) ; 44.5,-3.5 v1(45,-4) ; 44.5,-2.5 v1(45,-3) ; 44.5,-1.5 v1(45,-2) ; 44.5,-0.5 v1(45,-1) ; 44.5,0.5 v1(45,1) ; 44.5,1.5 v1(45,2) ; 44.5,2.5 v1(45,3) ; 44.5,3.5 v1(45,4) ; 44.5,4.5 v1(45,5) ; 44.5,5.5 v1(45,6) ; 44.5,6.5 v1(45,7) ; 44.5,11.5 v1(45,12) ; 45.5,-12.5 v1(46,-13) ; 45.5,-11.5 v1(46,-12) ; 45.5,-10.5 v1(46,-11) ; 45.5,-9.5 v1(46,-10) ; 45.5,-8.5 v1(46,-9) ; 45.5,-7.5 v1(46,-8) ; 45.5,-6.5 v1(46,-7) ; 45.5,-5.5 v1(46,-6) ; 45.5,-4.5 v1(46,-5) ; 45.5,-3.5 v1(46,-4) ; 45.5,-2.5 v1(46,-3) ; 45.5,-1.5 v1(46,-2) ; 45.5,-0.5 v1(46,-1) ; 45.5,0.5 v1(46,1) ; 45.5,1.5 v1(46,2) ; 45.5,2.5 v1(46,3) ; 45.5,3.5 v1(46,4) ; 45.5,4.5 v1(46,5) ; 45.5,5.5 v1(46,6) ; 45.5,6.5 v1(46,7) ; 45.5,8.5 v1(46,9) ; 46.5,-12.5 v1(47,-13) ; 46.5,-11.5 v1(47,-12) ; 46.5,-10.5 v1(47,-11) ; 46.5,-9.5 v1(47,-10) ; 46.5,-8.5 v1(47,-9) ; 46.5,-7.5 v1(47,-8) ; 46.5,-6.5 v1(47,-7) ; 46.5,-5.5 v1(47,-6) ; 46.5,-4.5 v1(47,-5) ; 46.5,-3.5 v1(47,-4) ; 46.5,-2.5 v1(47,-3) ; 46.5,-1.5 v1(47,-2) ; 46.5,-0.5 v1(47,-1) ; 46.5,0.5 v1(47,1) ; 46.5,1.5 v1(47,2) ; 46.5,2.5 v1(47,3) ; 46.5,3.5 v1(47,4) ; 46.5,4.5 v1(47,5) ; 46.5,5.5 v1(47,6) ; 46.5,6.5 v1(47,7) ; 46.5,10.5 v1(47,11) ; 47.5,-12.5 v1(48,-13) ; 47.5,-11.5 v1(48,-12) ; 47.5,-10.5 v1(48,-11) ; 47.5,-9.5 v1(48,-10) ; 47.5,-8.5 v1(48,-9) ; 47.5,-7.5 v1(48,-8) ; 47.5,-6.5 v1(48,-7) ; 47.5,-5.5 v1(48,-6) ; 47.5,-4.5 v1(48,-5) ; 47.5,-3.5 v1(48,-4) ; 47.5,-2.5 v1(48,-3) ; 47.5,-1.5 v1(48,-2) ; 47.5,-0.5 v1(48,-1) ; 47.5,0.5 v1(48,1) ; 47.5,1.5 v1(48,2) ; 47.5,2.5 v1(48,3) ; 47.5,3.5 v1(48,4) ; 47.5,4.5 v1(48,5) ; 47.5,5.5 v1(48,6) ; 47.5,6.5 v1(48,7) ; 47.5,7.5 v1(48,8) ; 47.5,8.5 v1(48,9) ; 47.5,9.5 v1(48,10) ; 47.5,10.5 v1(48,11) ; 47.5,11.5 v1(48,12) ; 47.5,12.5 v1(48,13) ; 48.5,-12.5 v1(49,-13) ; 48.5,-11.5 v1(49,-12) ; 48.5,-10.5 v1(49,-11) ; 48.5,-9.5 v1(49,-10) ; 48.5,-8.5 v1(49,-9) ; 48.5,-7.5 v1(49,-8) ; 48.5,-6.5 v1(49,-7) ; 48.5,-5.5 v1(49,-6) ; 48.5,-4.5 v1(49,-5) ; 48.5,-3.5 v1(49,-4) ; 48.5,-2.5 v1(49,-3) ; 48.5,-1.5 v1(49,-2) ; 48.5,-0.5 v1(49,-1) ; 48.5,0.5 v1(49,1) ; 48.5,1.5 v1(49,2) ; 48.5,2.5 v1(49,3) ; 48.5,3.5 v1(49,4) ; 48.5,4.5 v1(49,5) ; 48.5,5.5 v1(49,6) ; 48.5,6.5 v1(49,7) ; 48.5,7.5 v1(49,8) ; 48.5,8.5 v1(49,9) ; 48.5,9.5 v1(49,10) ; 48.5,10.5 v1(49,11) ; 48.5,11.5 v1(49,12) ; 48.5,12.5 v1(49,13) ; 49.5,-12.5 v1(50,-13) ; 49.5,-11.5 v1(50,-12) ; 49.5,-10.5 v1(50,-11) ; 49.5,-9.5 v1(50,-10) ; 49.5,-8.5 v1(50,-9) ; 49.5,-7.5 v1(50,-8) ; 49.5,-6.5 v1(50,-7) ; 49.5,-5.5 v1(50,-6) ; 49.5,-4.5 v1(50,-5) ; 49.5,-3.5 v1(50,-4) ; 49.5,-2.5 v1(50,-3) ; 49.5,-1.5 v1(50,-2) ; 49.5,-0.5 v1(50,-1) ; 49.5,0.5 v1(50,1) ; 49.5,1.5 v1(50,2) ; 49.5,2.5 v1(50,3) ; 49.5,3.5 v1(50,4) ; 49.5,4.5 v1(50,5) ; 49.5,5.5 v1(50,6) ; 49.5,6.5 v1(50,7) ; 49.5,7.5 v1(50,8) ; 49.5,8.5 v1(50,9) ; 49.5,9.5 v1(50,10) ; 49.5,10.5 v1(50,11) ; 49.5,11.5 v1(50,12) ; 49.5,12.5 v1(50,13) ; 50.5,-12.5 v1(51,-13) ; 50.5,-11.5 v1(51,-12) ; 50.5,-10.5 v1(51,-11) ; 50.5,-9.5 v1(51,-10) ; 50.5,-8.5 v1(51,-9) ; 50.5,-7.5 v1(51,-8) ; 50.5,-6.5 v1(51,-7) ; 50.5,-5.5 v1(51,-6) ; 50.5,-4.5 v1(51,-5) ; 50.5,-3.5 v1(51,-4) ; 50.5,-2.5 v1(51,-3) ; 50.5,-1.5 v1(51,-2) ; 50.5,-0.5 v1(51,-1) ; 50.5,0.5 v1(51,1) ; 50.5,1.5 v1(51,2) ; 50.5,2.5 v1(51,3) ; 50.5,3.5 v1(51,4) ; 50.5,4.5 v1(51,5) ; 50.5,5.5 v1(51,6) ; 50.5,6.5 v1(51,7) ; 50.5,7.5 v1(51,8) ; 50.5,8.5 v1(51,9) ; 50.5,9.5 v1(51,10) ; 50.5,10.5 v1(51,11) ; 50.5,11.5 v1(51,12) ; 50.5,12.5 v1(51,13) ; 51.5,-12.5 v1(52,-13) ; 51.5,-11.5 v1(52,-12) ; 51.5,-10.5 v1(52,-11) ; 51.5,-9.5 v1(52,-10) ; 51.5,-8.5 v1(52,-9) ; 51.5,-7.5 v1(52,-8) ; 51.5,-6.5 v1(52,-7) ; 51.5,-5.5 v1(52,-6) ; 51.5,-4.5 v1(52,-5) ; 51.5,-3.5 v1(52,-4) ; 51.5,-2.5 v1(52,-3) ; 51.5,-1.5 v1(52,-2) ; 51.5,-0.5 v1(52,-1) ; 51.5,0.5 v1(52,1) ; 51.5,1.5 v1(52,2) ; 51.5,2.5 v1(52,3) ; 51.5,3.5 v1(52,4) ; 51.5,4.5 v1(52,5) ; 51.5,5.5 v1(52,6) ; 51.5,6.5 v1(52,7) ; 51.5,7.5 v1(52,8) ; 51.5,8.5 v1(52,9) ; 51.5,9.5 v1(52,10) ; 51.5,10.5 v1(52,11) ; 51.5,11.5 v1(52,12) ; 51.5,12.5 v1(52,13) ; 52.5,-12.5 v1(53,-13) ; 52.5,-11.5 v1(53,-12) ; 52.5,-10.5 v1(53,-11) ; 52.5,-9.5 v1(53,-10) ; 52.5,-8.5 v1(53,-9) ; 52.5,-7.5 v1(53,-8) ; 52.5,-6.5 v1(53,-7) ; 52.5,-5.5 v1(53,-6) ; 52.5,-4.5 v1(53,-5) ; 52.5,-3.5 v1(53,-4) ; 52.5,-2.5 v1(53,-3) ; 52.5,-1.5 v1(53,-2) ; 52.5,-0.5 v1(53,-1) ; 52.5,0.5 v1(53,1) ; 52.5,1.5 v1(53,2) ; 52.5,2.5 v1(53,3) ; 52.5,3.5 v1(53,4) ; 52.5,4.5 v1(53,5) ; 52.5,5.5 v1(53,6) ; 52.5,6.5 v1(53,7) ; 52.5,7.5 v1(53,8) ; 52.5,8.5 v1(53,9) ; 52.5,9.5 v1(53,10) ; 52.5,10.5 v1(53,11) ; 52.5,11.5 v1(53,12) ; 52.5,12.5 v1(53,13)

## Polygon pours and split planes (outlines as drawn)
no net on Int1 (GND) (split plane): 206 vertices, not listed, extent 0.51,-41.49 72.49,41.49
no net on Int4 (PWR) (split plane): 206 vertices, not listed, extent 0.51,-41.49 72.49,41.49

## Silkscreen, mask and mechanical layers (free items; w line width, h text height)
Top Solder:
  region: 0,-42 65,-42 66.457,-40.543 0,-40.543
  region: 0,42 65,42 66.457,40.543 0,40.543
Mechanical 1:
  lines w0.013: 0,-42 65,-42 66.457,-40.543 cw(c67.164,-41.25) 67.164,-40.25 71.5,-40.25 73,-38.75 73,38.75 71.5,40.25 67.164,40.25 cw(c67.164,41.25) 66.457,40.543 65,42 0,42
Mechanical 2:
  circle w0.013: c69,-38 r1.35
  circle w0.013: c69,38 r1.35